# Altium PCB Receiver.PcbDoc (part 4 of 4)
Units mil, origin at the board's own origin, x right, y up, seen from the top; angles counter-clockwise.
Board outline 6370 x 5700 mil, 4 copper layers (Top Layer, GND, VCC, Bottom Layer), stack 23.756 mil thick; 303 components, 262 nets, 1184 pads, 312 vias.
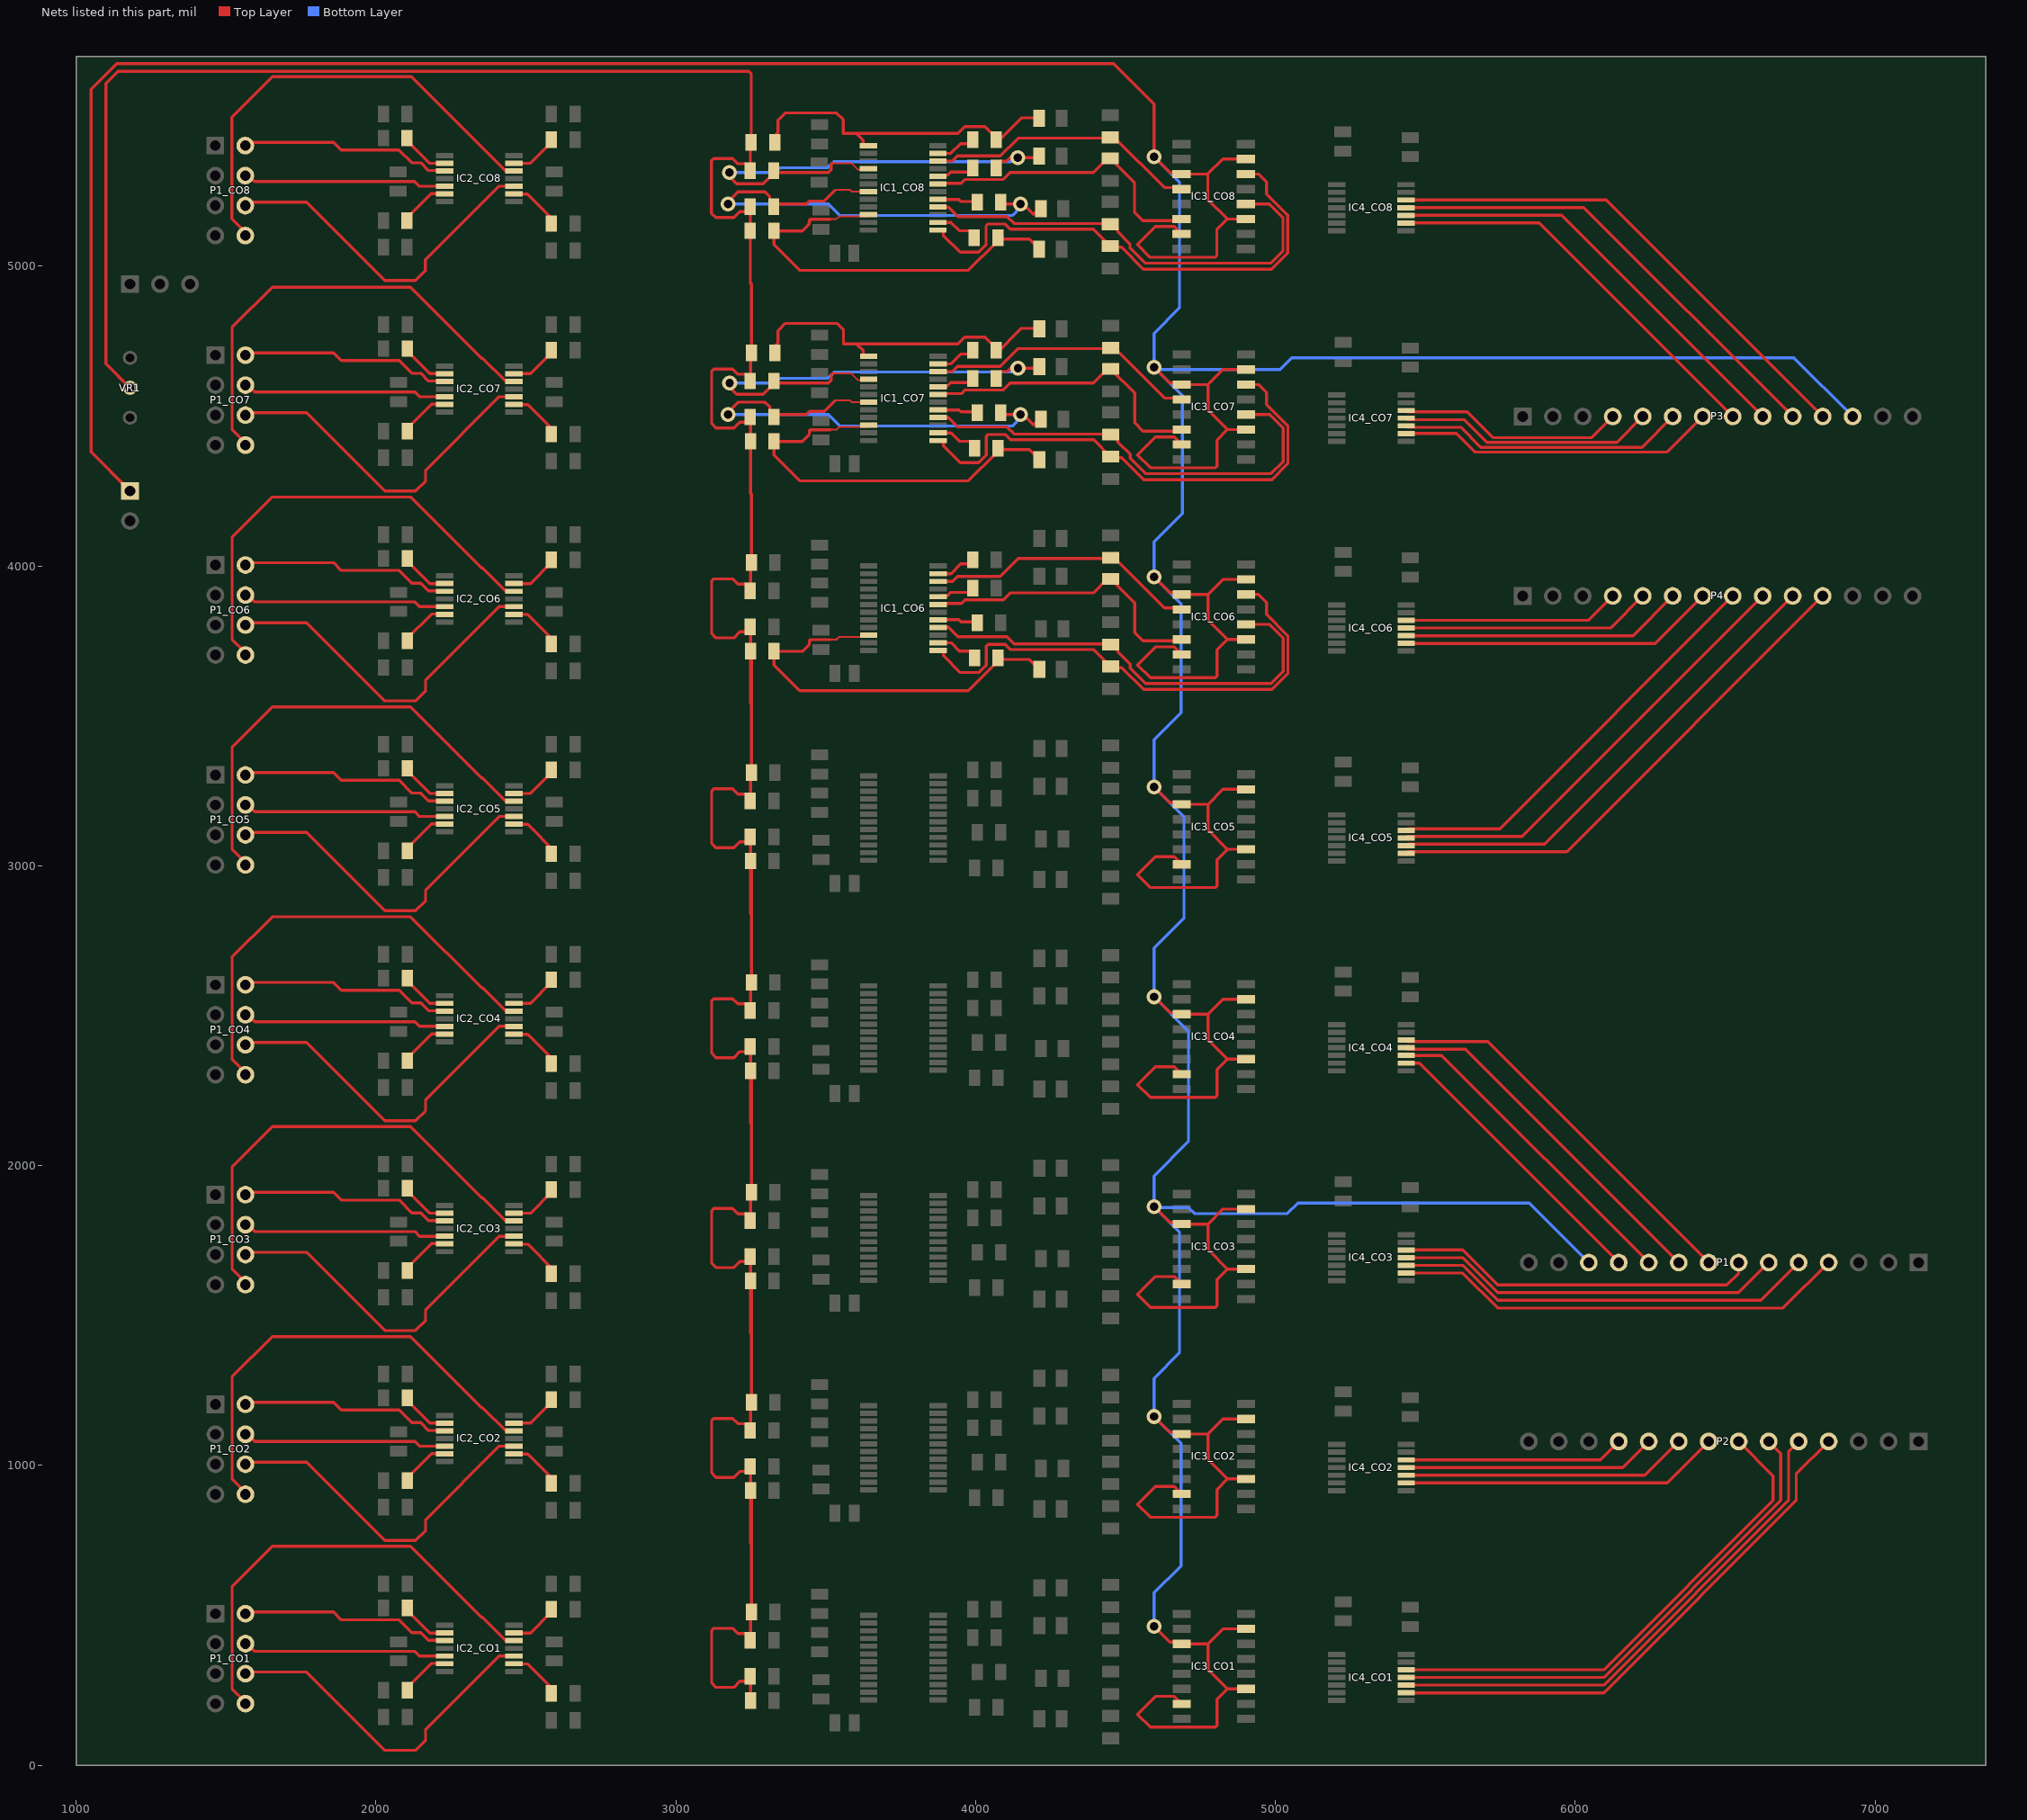
[diagram p6: the nets of this part, all layers, seen from the top]

## Via types
v1: diameter 50, hole 28, Top Layer to Bottom Layer, 312 vias

## Nets (pads, with @x,y where several pads share a name; then routed paths per layer and width w, separated by ;. In a path a pad name is that pad's centre, name@x,y a point inside that pad or via, vN(x,y) a via of type N, cw(c..) or ccw(c..) an arc to the next point about the centre after c; other vN are vias at no path point) (continued)
NetIC1_CO6_10: IC1_CO6.10 R7_CO6.2 R8_CO6.2 R11_CO6.2 | length 1397.6
  Top Layer w6: 3515.2,3754.23 3535.46,3754.23 3544.95,3763.71 3637.86,3763.71 IC1_CO6.10@3643.54,3769.39
  Top Layer w10: R7_CO6.2@3326.94,3715 R7_CO6.2@3327.94,3716 R7_CO6.2@3327.94,3715 ; 3515.2,3754.23 3449.15,3754.23 3446.81,3751.89 3446.81,3751.23 3446.15,3751.23 3446.15,3744.2 3445.5,3743.56 3445.5,3738.34 3422.16,3715 R7_CO6.2@3327.94,3715 ; R8_CO6.2@4067.34,3716 4095.31,3688.03 4179.57,3688.03 R11_CO6.2@4212.6,3655 ; R8_CO6.2@4074.8,3693.03 4068.73,3686.96 4068.73,3676.33 3976.4,3583.99 3413.83,3583.99 3327.94,3669.87 R7_CO6.2@3327.94,3715
NetIC1_CO6_13: IC1_CO6.13 IC3_CO6.14 R23_CO6.2 | length 1711.3
  Top Layer w10: IC1_CO6.13@3874.87,3718.2 3889.02,3718.2 3892.87,3714.35 3892.87,3700.2 3948.59,3644.49 4010.43,3644.49 4035.43,3669.49 4035.43,3732.49 4041.29,3738.34 4098.84,3738.34 4116.19,3721 4393.8,3721 R23_CO6.2@4450,3664.8 4454.03,3660.78 4487.69,3660.78 4560.43,3588.03 4988.06,3588.03 5041.43,3641.4 5041.43,3767.66 4970.43,3838.66 4970.43,3878.57 4944,3905 IC3_CO6.14@4902.16,3905
NetIC1_CO6_14: IC1_CO6.14 R8_CO6.1 | length 125.2
  Top Layer w10: IC1_CO6.14@3874.87,3743.8 3917.97,3743.8 3945.76,3716 R8_CO6.1@3988.6,3716
NetIC1_CO6_16: IC1_CO6.16 IC3_CO6.12 R24_CO6.2 | length 1511.5
  Top Layer w10: IC1_CO6.16@3874.87,3794.98 3910.36,3794.98 3941.63,3763.71 4104.8,3763.71 4128.51,3740 4447.84,3740 R24_CO6.2@4450,3737.84 4458.86,3737.84 4473.54,3723.16 4473.54,3714.3 4515.43,3672.41 4515.43,3658.99 4566.4,3608.03 4985.43,3608.03 5025.43,3648.03 5025.43,3760 4980.43,3805 IC3_CO6.12@4902.16,3805
NetIC1_CO6_17: IC1_CO6.17 R6_CO6.1 | length 116.6
  Top Layer w10: IC1_CO6.17@3874.87,3820.57 3944.28,3820.57 3951.13,3813.71 R6_CO6.1@3988.6,3813.71
NetIC1_CO6_19: IC1_CO6.19 IC3_CO6.6 R22_CO6.1 | length 983.6
  Top Layer w10: IC1_CO6.19@3874.87,3871.75 3877.84,3874.71 3952.6,3874.71 3964.93,3887.05 4092.63,3887.05 4115.58,3910 4393.22,3910 R22_CO6.1@4440,3956.78 ; R22_CO6.1@4450,3957.15 4530.43,3876.72 4530.43,3778.03 4558.46,3750 4682.59,3750 IC3_CO6.6@4687.59,3755
NetIC1_CO6_20: IC1_CO6.20 R4_CO6.1 | length 119.7
  Top Layer w10: IC1_CO6.20@3874.87,3897.34 3878.73,3901.2 3906.59,3901.2 3917.14,3911.75 R4_CO6.1@3988.6,3911.75
NetIC1_CO6_22: IC1_CO6.22 IC3_CO6.4 R21_CO6.1 | length 914.8
  Top Layer w10: IC1_CO6.22@3874.87,3948.52 3923.04,3948.52 3940,3965.48 4082.8,3965.48 4142.31,4025 4440,4025 4465.43,4025 4630.43,3860 4682.59,3860 IC3_CO6.4@4687.59,3855
NetIC1_CO6_23: IC1_CO6.23 R2_CO6.1 | length 127.2
  Top Layer w10: IC1_CO6.23@3874.87,3974.11 3917.97,3974.11 3950.61,4006.75 R2_CO6.1@3988.6,4006.75
NetIC1_CO7_1: IC1_CO7.1 R1_CO7.2 R2_CO7.2 R9_CO7.1 | length 1146.5
  Top Layer w10: R1_CO7.2@3327.94,4706.75 3331.13,4709.94 3331.13,4733.31 3341.07,4743.25 3341.07,4784.44 3365.62,4808.99 3537.19,4808.99 3559.43,4786.75 3559.43,4740.41 3602.83,4740.41 ; IC1_CO7.1@3643.54,4699.7 3629.39,4699.7 3625.53,4703.56 3625.53,4717.7 3602.83,4740.41 ; R2_CO7.2@4062.49,4732.22 4031.69,4763.03 3964.25,4763.03 3941.63,4740.41 3602.83,4740.41 ; R2_CO7.2@4067.34,4706.75 4153.11,4792.52 4209.37,4792.52 4210.63,4791.26 R9_CO7.1@4210.63,4782.4
NetIC1_CO7_4: IC1_CO7.4 R3_CO7.2 R4_CO7.2 R10_CO7.1 | length 1735.8
  Top Layer w6: 3522.97,4641.75 3585.97,4641.75 3607.97,4619.75 3640.35,4619.75 IC1_CO7.4@3643.54,4622.93
  Top Layer w10: v1(3180,4610) 3180,4600.6 3177.97,4598.57 3203.83,4572.71 3292.11,4572.71 3297.97,4578.57 ; 3298.04,4578.59 3327.34,4607.89 R3_CO7.2@3327.34,4616.75 ; R3_CO7.2@3327.94,4606.75 3331.13,4609.94 3509.26,4609.94 3518.7,4619.38 3518.7,4637.48 3522.97,4641.75 ; R4_CO7.2@4056.98,4625.61 R4_CO7.2@4069.37,4625.61 4069.37,4634.46 4083.07,4648.17 4104.16,4648.17 4133.63,4677.64 4141.27,4670 v1(4141.27,4660) 4207.12,4660 R10_CO7.1@4212.6,4665.48 ; R10_CO7.1@4207.34,4672.51 R10_CO7.1@4207.34,4681.37
  Bottom Layer w10: v1(3180,4610) 3331.22,4610 3347.22,4626 3507.22,4626 3527.97,4646.75 4117.97,4646.75 4135,4663.78 v1@4140,4663.78
NetIC1_CO7_7: IC1_CO7.7 R5_CO7.2 R6_CO7.2 R12_CO7.2 | length 1664
  Top Layer w6: 3530.76,4549.71 3533.76,4552.71 3540.56,4552.71 3540.6,4552.75 3580.76,4552.75 3587.35,4546.16 IC1_CO7.7@3643.54,4546.16
  Top Layer w10: 3187.97,4526.75 3207.38,4546.16 3297.97,4546.16 3313.64,4530.49 3313.64,4510.45 R5_CO7.2@3327.34,4496.75 ; R5_CO7.2@3333.73,4516.75 3333.73,4512.31 3341.04,4505 3435.92,4505 3446.15,4515.23 3496.28,4515.23 3530.76,4549.71 ; R6_CO7.2@4084.37,4510.96 4090.33,4505 v1@4128.51,4505 ; v1(4150,4505) 4158.5,4505 4193.05,4470.45 R12_CO7.2@4212.6,4490
  Bottom Layer w10: v1(3175,4505) 3509.72,4505 3547.97,4466.75 4122.57,4466.75 4150,4494.18 v1(4150,4505)
NetIC1_CO7_10: IC1_CO7.10 R7_CO7.2 R8_CO7.2 R11_CO7.2 | length 1397.6
  Top Layer w6: 3515.2,4454.23 3535.46,4454.23 3544.95,4463.71 3637.86,4463.71 IC1_CO7.10@3643.54,4469.39
  Top Layer w10: R7_CO7.2@3326.94,4415 R7_CO7.2@3327.94,4416 R7_CO7.2@3327.94,4415 ; 3515.2,4454.23 3449.15,4454.23 3446.81,4451.89 3446.81,4451.23 3446.15,4451.23 3446.15,4444.2 3445.5,4443.56 3445.5,4438.34 3422.16,4415 R7_CO7.2@3327.94,4415 ; R8_CO7.2@4067.34,4416 4095.31,4388.03 4179.57,4388.03 R11_CO7.2@4212.6,4355 ; R8_CO7.2@4074.8,4393.03 4068.73,4386.96 4068.73,4376.33 3976.4,4283.99 3413.83,4283.99 3327.94,4369.87 R7_CO7.2@3327.94,4415
NetIC1_CO7_13: IC1_CO7.13 IC3_CO7.14 R23_CO7.2 | length 1711.3
  Top Layer w10: IC1_CO7.13@3874.87,4418.2 3889.02,4418.2 3892.87,4414.35 3892.87,4400.2 3948.59,4344.49 4010.43,4344.49 4035.43,4369.49 4035.43,4432.49 4041.29,4438.34 4098.84,4438.34 4116.19,4421 4393.8,4421 R23_CO7.2@4450,4364.8 4454.03,4360.78 4487.69,4360.78 4560.43,4288.03 4988.06,4288.03 5041.43,4341.4 5041.43,4467.66 4970.43,4538.66 4970.43,4578.57 4944,4605 IC3_CO7.14@4902.16,4605
NetIC1_CO7_14: IC1_CO7.14 R8_CO7.1 | length 125.2
  Top Layer w10: IC1_CO7.14@3874.87,4443.8 3917.97,4443.8 3945.76,4416 R8_CO7.1@3988.6,4416
NetIC1_CO7_16: IC1_CO7.16 IC3_CO7.12 R24_CO7.2 | length 1511.5
  Top Layer w10: IC1_CO7.16@3874.87,4494.98 3910.36,4494.98 3941.63,4463.71 4104.8,4463.71 4128.51,4440 4447.84,4440 R24_CO7.2@4450,4437.84 4458.86,4437.84 4473.54,4423.16 4473.54,4414.3 4515.43,4372.41 4515.43,4358.99 4566.4,4308.03 4985.43,4308.03 5025.43,4348.03 5025.43,4460 4980.43,4505 IC3_CO7.12@4902.16,4505
NetIC1_CO7_17: IC1_CO7.17 R6_CO7.1 | length 116.6
  Top Layer w10: IC1_CO7.17@3874.87,4520.57 3944.28,4520.57 3951.13,4513.71 R6_CO7.1@3988.6,4513.71
NetIC1_CO7_19: IC1_CO7.19 IC3_CO7.6 R22_CO7.1 | length 983.6
  Top Layer w10: IC1_CO7.19@3874.87,4571.75 3877.84,4574.71 3952.6,4574.71 3964.93,4587.05 4092.63,4587.05 4115.58,4610 4393.22,4610 R22_CO7.1@4440,4656.78 ; R22_CO7.1@4450,4657.15 4530.43,4576.72 4530.43,4478.03 4558.46,4450 4682.59,4450 IC3_CO7.6@4687.59,4455
NetIC1_CO7_20: IC1_CO7.20 R4_CO7.1 | length 119.7
  Top Layer w10: IC1_CO7.20@3874.87,4597.34 3878.73,4601.2 3906.59,4601.2 3917.14,4611.75 R4_CO7.1@3988.6,4611.75
NetIC1_CO7_22: IC1_CO7.22 IC3_CO7.4 R21_CO7.1 | length 914.8
  Top Layer w10: IC1_CO7.22@3874.87,4648.52 3923.04,4648.52 3940,4665.48 4082.8,4665.48 4142.31,4725 4440,4725 4465.43,4725 4630.43,4560 4682.59,4560 IC3_CO7.4@4687.59,4555
NetIC1_CO7_23: IC1_CO7.23 R2_CO7.1 | length 127.2
  Top Layer w10: IC1_CO7.23@3874.87,4674.11 3917.97,4674.11 3950.61,4706.75 R2_CO7.1@3988.6,4706.75
NetIC1_CO8_1: IC1_CO8.1 R1_CO8.2 R2_CO8.2 R9_CO8.1 | length 1146.5
  Top Layer w10: R1_CO8.2@3327.51,5408.72 3330.7,5411.91 3330.7,5435.29 3340.64,5445.22 3340.64,5486.41 3365.19,5510.96 3536.76,5510.96 3559,5488.72 3559,5442.38 3602.39,5442.38 ; IC1_CO8.1@3643.1,5401.67 3628.96,5401.67 3625.1,5405.53 3625.1,5419.67 3602.39,5442.38 ; R2_CO8.2@4062.06,5434.2 4031.25,5465 3963.82,5465 3941.2,5442.38 3602.39,5442.38 ; R2_CO8.2@4066.91,5408.72 4152.68,5494.49 4208.94,5494.49 4210.2,5493.23 R9_CO8.1@4210.2,5484.37
NetIC1_CO8_4: IC1_CO8.4 R3_CO8.2 R4_CO8.2 R10_CO8.1 | length 1735.8
  Top Layer w6: 3522.54,5343.72 3585.54,5343.72 3607.54,5321.72 3639.92,5321.72 IC1_CO8.4@3643.1,5324.9
  Top Layer w10: v1(3179.57,5311.97) 3179.57,5302.57 3177.54,5300.54 3203.39,5274.68 3291.68,5274.68 3297.54,5280.54 ; 3297.61,5280.56 3326.91,5309.86 R3_CO8.2@3326.91,5318.72 ; R3_CO8.2@3327.51,5308.72 3330.7,5311.91 3508.83,5311.91 3518.27,5321.35 3518.27,5339.45 3522.54,5343.72 ; R4_CO8.2@4056.55,5327.58 R4_CO8.2@4068.94,5327.58 4068.94,5336.44 4082.64,5350.14 4103.72,5350.14 4133.2,5379.61 4140.83,5371.97 v1(4140.83,5361.97) 4206.68,5361.97 R10_CO8.1@4212.17,5367.45 ; R10_CO8.1@4206.91,5374.48 R10_CO8.1@4206.91,5383.34
  Bottom Layer w10: v1(3179.57,5311.97) 3330.79,5311.97 3346.79,5327.97 3506.79,5327.97 3527.54,5348.72 4117.54,5348.72 4134.57,5365.75 v1@4139.57,5365.75
NetIC1_CO8_7: IC1_CO8.7 R5_CO8.2 R6_CO8.2 R12_CO8.2 | length 1664
  Top Layer w6: 3530.33,5251.68 3533.33,5254.68 3540.13,5254.68 ; IC1_CO8.7@3643.1,5248.13 3586.92,5248.13 3580.33,5254.72 3540.17,5254.72 ; 3540.13,5254.68 3540.17,5254.72
  Top Layer w10: 3187.54,5228.72 3206.94,5248.13 3297.54,5248.13 3313.2,5232.46 3313.2,5212.42 R5_CO8.2@3326.91,5198.72 ; R5_CO8.2@3333.3,5218.72 3333.3,5214.28 3340.61,5206.97 3435.49,5206.97 3445.72,5217.2 3495.85,5217.2 3530.33,5251.68 ; R6_CO8.2@4083.94,5212.93 4089.9,5206.97 v1@4128.07,5206.97 ; v1(4149.57,5206.97) 4158.06,5206.97 4192.62,5172.42 R12_CO8.2@4212.17,5191.97
  Bottom Layer w10: v1(3174.57,5206.97) 3509.28,5206.97 3547.54,5168.72 4122.14,5168.72 4149.57,5196.15 v1(4149.57,5206.97)
NetIC1_CO8_10: IC1_CO8.10 R7_CO8.2 R8_CO8.2 R11_CO8.2 | length 1397.6
  Top Layer w6: 3514.77,5156.2 3535.03,5156.2 3544.51,5165.68 3637.43,5165.68 IC1_CO8.10@3643.1,5171.36
  Top Layer w10: R7_CO8.2@3326.51,5116.97 R7_CO8.2@3327.51,5117.97 R7_CO8.2@3327.51,5116.97 ; 3514.77,5156.2 3448.72,5156.2 3446.38,5153.86 3446.38,5153.2 3445.72,5153.2 3445.72,5146.18 3445.07,5145.53 3445.07,5140.31 3421.72,5116.97 R7_CO8.2@3327.51,5116.97 ; R8_CO8.2@4066.91,5117.97 4094.88,5090 4179.14,5090 R11_CO8.2@4212.17,5056.97 ; R8_CO8.2@4074.37,5095 4068.3,5088.93 4068.3,5078.3 3975.96,4985.96 3413.39,4985.96 3327.51,5071.84 R7_CO8.2@3327.51,5116.97
NetIC1_CO8_13: IC1_CO8.13 IC3_CO8.14 R23_CO8.2 | length 1711.3
  Top Layer w10: IC1_CO8.13@3874.44,5120.18 3888.58,5120.18 3892.44,5116.32 3892.44,5102.17 3948.15,5046.46 4010,5046.46 4035,5071.46 4035,5134.46 4040.86,5140.31 4098.41,5140.31 4115.75,5122.97 4393.37,5122.97 R23_CO8.2@4449.57,5066.77 4453.59,5062.75 4487.25,5062.75 4560,4990 4987.63,4990 5041,5043.37 5041,5169.63 4970,5240.63 4970,5280.54 4943.57,5306.97 IC3_CO8.14@4901.72,5306.97
NetIC1_CO8_14: IC1_CO8.14 R8_CO8.1 | length 125.2
  Top Layer w10: IC1_CO8.14@3874.44,5145.77 3917.54,5145.77 3945.33,5117.97 R8_CO8.1@3988.17,5117.97
NetIC1_CO8_16: IC1_CO8.16 IC3_CO8.12 R24_CO8.2 | length 1511.5
  Top Layer w10: IC1_CO8.16@3874.44,5196.95 3909.93,5196.95 3941.2,5165.68 4104.36,5165.68 4128.07,5141.97 4447.41,5141.97 R24_CO8.2@4449.57,5139.81 4458.43,5139.81 4473.11,5125.13 4473.11,5116.27 4515,5074.38 4515,5060.96 4565.96,5010 4985,5010 5025,5050 5025,5161.97 4980,5206.97 IC3_CO8.12@4901.72,5206.97
NetIC1_CO8_17: IC1_CO8.17 R6_CO8.1 | length 116.6
  Top Layer w10: IC1_CO8.17@3874.44,5222.54 3943.84,5222.54 3950.7,5215.68 R6_CO8.1@3988.17,5215.68
NetIC1_CO8_19: IC1_CO8.19 IC3_CO8.6 R22_CO8.1 | length 983.6
  Top Layer w10: IC1_CO8.19@3874.44,5273.72 3877.4,5276.68 3952.16,5276.68 3964.5,5289.02 4092.19,5289.02 4115.15,5311.97 4392.78,5311.97 R22_CO8.1@4439.57,5358.75 ; R22_CO8.1@4449.57,5359.12 4530,5278.69 4530,5180 4558.03,5151.97 4682.16,5151.97 IC3_CO8.6@4687.16,5156.97
NetIC1_CO8_20: IC1_CO8.20 R4_CO8.1 | length 119.7
  Top Layer w10: IC1_CO8.20@3874.44,5299.31 3878.3,5303.17 3906.16,5303.17 3916.71,5313.72 R4_CO8.1@3988.17,5313.72
NetIC1_CO8_22: IC1_CO8.22 IC3_CO8.4 R21_CO8.1 | length 914.8
  Top Layer w10: IC1_CO8.22@3874.44,5350.49 3922.61,5350.49 3939.57,5367.45 4082.36,5367.45 4141.88,5426.97 4439.57,5426.97 4465,5426.97 4630,5261.97 4682.16,5261.97 IC3_CO8.4@4687.16,5256.97
NetIC1_CO8_23: IC1_CO8.23 R2_CO8.1 | length 127.2
  Top Layer w10: IC1_CO8.23@3874.44,5376.08 3917.54,5376.08 3950.17,5408.72 R2_CO8.1@3988.17,5408.72
NetIC2_CO1_2: IC2_CO1.2 R13_CO1.2 | length 165.5
  Top Layer w10: R13_CO1.2@2104.37,525 2104.37,516.14 2179.33,441.18 IC2_CO1.2@2229.57,441.18 ; R13_CO1.2@2105,503.7 R13_CO1.2@2105,504.11
NetIC2_CO1_6: IC2_CO1.6 R14_CO1.1 | length 167.9
  Top Layer w10: R14_CO1.1@2104.37,250 2104.37,258.86 2185.18,339.67 2228.72,339.67 IC2_CO1.6@2229.57,338.82
NetIC2_CO1_9: IC2_CO1.9 R15_CO1.1 | length 180.8
  Top Layer w10: IC2_CO1.9@2460.91,338.82 2461.69,338.03 2506.46,338.03 2595.63,248.86 R15_CO1.1@2595.63,240
NetIC2_CO1_13: IC2_CO1.13 R16_CO1.2 | length 162.6
  Top Layer w10: IC2_CO1.13@2460.91,441.18 2515.67,441.18 2585.63,511.14 R16_CO1.2@2585.63,520
NetIC2_CO2_2: IC2_CO2.2 R13_CO2.2 | length 165.5
  Top Layer w10: R13_CO2.2@2104.37,1225 2104.37,1216.14 2179.33,1141.18 IC2_CO2.2@2229.57,1141.18 ; R13_CO2.2@2105,1203.7 R13_CO2.2@2105,1204.11
NetIC2_CO2_6: IC2_CO2.6 R14_CO2.1 | length 167.9
  Top Layer w10: R14_CO2.1@2104.37,950 2104.37,958.86 2185.18,1039.67 2228.72,1039.67 IC2_CO2.6@2229.57,1038.82
NetIC2_CO2_9: IC2_CO2.9 R15_CO2.1 | length 180.8
  Top Layer w10: IC2_CO2.9@2460.91,1038.82 2461.69,1038.03 2506.46,1038.03 2595.63,948.86 R15_CO2.1@2595.63,940
NetIC2_CO2_13: IC2_CO2.13 R16_CO2.2 | length 162.6
  Top Layer w10: IC2_CO2.13@2460.91,1141.18 2515.67,1141.18 2585.63,1211.14 R16_CO2.2@2585.63,1220
NetIC2_CO3_2: IC2_CO3.2 R13_CO3.2 | length 165.5
  Top Layer w10: R13_CO3.2@2104.37,1925 2104.37,1916.14 2179.33,1841.18 IC2_CO3.2@2229.57,1841.18 ; R13_CO3.2@2105,1903.7 R13_CO3.2@2105,1904.11
NetIC2_CO3_6: IC2_CO3.6 R14_CO3.1 | length 167.9
  Top Layer w10: R14_CO3.1@2104.37,1650 2104.37,1658.86 2185.18,1739.67 2228.72,1739.67 IC2_CO3.6@2229.57,1738.82
NetIC2_CO3_9: IC2_CO3.9 R15_CO3.1 | length 180.8
  Top Layer w10: IC2_CO3.9@2460.91,1738.82 2461.69,1738.03 2506.46,1738.03 2595.63,1648.86 R15_CO3.1@2595.63,1640
NetIC2_CO3_13: IC2_CO3.13 R16_CO3.2 | length 162.6
  Top Layer w10: IC2_CO3.13@2460.91,1841.18 2515.67,1841.18 2585.63,1911.14 R16_CO3.2@2585.63,1920
NetIC2_CO4_2: IC2_CO4.2 R13_CO4.2 | length 165.5
  Top Layer w10: R13_CO4.2@2104.37,2625 2104.37,2616.14 2179.33,2541.18 IC2_CO4.2@2229.57,2541.18 ; R13_CO4.2@2105,2603.7 R13_CO4.2@2105,2604.11
NetIC2_CO4_6: IC2_CO4.6 R14_CO4.1 | length 167.9
  Top Layer w10: R14_CO4.1@2104.37,2350 2104.37,2358.86 2185.18,2439.67 2228.72,2439.67 IC2_CO4.6@2229.57,2438.82
NetIC2_CO4_9: IC2_CO4.9 R15_CO4.1 | length 180.8
  Top Layer w10: IC2_CO4.9@2460.91,2438.82 2461.69,2438.03 2506.46,2438.03 2595.63,2348.86 R15_CO4.1@2595.63,2340
NetIC2_CO4_13: IC2_CO4.13 R16_CO4.2 | length 162.6
  Top Layer w10: IC2_CO4.13@2460.91,2541.18 2515.67,2541.18 2585.63,2611.14 R16_CO4.2@2585.63,2620
NetIC2_CO5_2: IC2_CO5.2 R13_CO5.2 | length 165.5
  Top Layer w10: R13_CO5.2@2104.37,3325 2104.37,3316.14 2179.33,3241.18 IC2_CO5.2@2229.57,3241.18 ; R13_CO5.2@2105,3303.7 R13_CO5.2@2105,3304.11
NetIC2_CO5_6: IC2_CO5.6 R14_CO5.1 | length 167.9
  Top Layer w10: R14_CO5.1@2104.37,3050 2104.37,3058.86 2185.18,3139.67 2228.72,3139.67 IC2_CO5.6@2229.57,3138.82
NetIC2_CO5_9: IC2_CO5.9 R15_CO5.1 | length 180.8
  Top Layer w10: IC2_CO5.9@2460.91,3138.82 2461.69,3138.03 2506.46,3138.03 2595.63,3048.86 R15_CO5.1@2595.63,3040
NetIC2_CO5_13: IC2_CO5.13 R16_CO5.2 | length 162.6
  Top Layer w10: IC2_CO5.13@2460.91,3241.18 2515.67,3241.18 2585.63,3311.14 R16_CO5.2@2585.63,3320
NetIC2_CO6_2: IC2_CO6.2 R13_CO6.2 | length 165.5
  Top Layer w10: R13_CO6.2@2104.37,4025 2104.37,4016.14 2179.33,3941.18 IC2_CO6.2@2229.57,3941.18 ; R13_CO6.2@2105,4003.7 R13_CO6.2@2105,4004.11
NetIC2_CO6_6: IC2_CO6.6 R14_CO6.1 | length 167.9
  Top Layer w10: R14_CO6.1@2104.37,3750 2104.37,3758.86 2185.18,3839.67 2228.72,3839.67 IC2_CO6.6@2229.57,3838.82
NetIC2_CO6_9: IC2_CO6.9 R15_CO6.1 | length 180.8
  Top Layer w10: IC2_CO6.9@2460.91,3838.82 2461.69,3838.03 2506.46,3838.03 2595.63,3748.86 R15_CO6.1@2595.63,3740
NetIC2_CO6_13: IC2_CO6.13 R16_CO6.2 | length 162.6
  Top Layer w10: IC2_CO6.13@2460.91,3941.18 2515.67,3941.18 2585.63,4011.14 R16_CO6.2@2585.63,4020
NetIC2_CO7_2: IC2_CO7.2 R13_CO7.2 | length 165.5
  Top Layer w10: R13_CO7.2@2104.37,4725 2104.37,4716.14 2179.33,4641.18 IC2_CO7.2@2229.57,4641.18 ; R13_CO7.2@2105,4703.7 R13_CO7.2@2105,4704.11
NetIC2_CO7_6: IC2_CO7.6 R14_CO7.1 | length 167.9
  Top Layer w10: R14_CO7.1@2104.37,4450 2104.37,4458.86 2185.18,4539.67 2228.72,4539.67 IC2_CO7.6@2229.57,4538.82
NetIC2_CO7_9: IC2_CO7.9 R15_CO7.1 | length 180.8
  Top Layer w10: IC2_CO7.9@2460.91,4538.82 2461.69,4538.03 2506.46,4538.03 2595.63,4448.86 R15_CO7.1@2595.63,4440
NetIC2_CO7_13: IC2_CO7.13 R16_CO7.2 | length 162.6
  Top Layer w10: IC2_CO7.13@2460.91,4641.18 2515.67,4641.18 2585.63,4711.14 R16_CO7.2@2585.63,4720
NetIC2_CO8_2: IC2_CO8.2 R13_CO8.2 | length 165.5
  Top Layer w10: R13_CO8.2@2103.94,5426.97 2103.94,5418.11 2178.9,5343.15 IC2_CO8.2@2229.13,5343.15 ; R13_CO8.2@2104.57,5405.67 R13_CO8.2@2104.57,5406.08
NetIC2_CO8_6: IC2_CO8.6 R14_CO8.1 | length 167.9
  Top Layer w10: R14_CO8.1@2103.94,5151.97 2103.94,5160.83 2184.75,5241.64 2228.29,5241.64 IC2_CO8.6@2229.13,5240.79
NetIC2_CO8_9: IC2_CO8.9 R15_CO8.1 | length 180.8
  Top Layer w10: IC2_CO8.9@2460.47,5240.79 2461.26,5240 2506.03,5240 2595.2,5150.83 R15_CO8.1@2595.2,5141.97
NetIC2_CO8_13: IC2_CO8.13 R16_CO8.2 | length 162.6
  Top Layer w10: IC2_CO8.13@2460.47,5343.15 2515.24,5343.15 2585.2,5413.11 R16_CO8.2@2585.2,5421.97
NetIC4_CO1_2: IC4_CO1.2 P2.4 | length 1807.7
  Top Layer w10: IC4_CO1.2@5436.1,241.85 6095,241.85 6736.77,883.62 6736.77,971.77 P2.4@6845,1080
NetIC4_CO1_3: IC4_CO1.3 P2.5 | length 1740.7
  Top Layer w10: IC4_CO1.3@5436.1,267.44 6095,267.44 6711.18,883.62 6711.18,1046.18 P2.5@6745,1080
NetIC4_CO1_4: IC4_CO1.4 P2.6 | length 1707.3
  Top Layer w10: IC4_CO1.4@5436.1,293.03 6095,293.03 6685.59,883.62 6685.59,1039.41 P2.6@6645,1080
NetIC4_CO1_5: IC4_CO1.5 P2.7 | length 1701.9
  Top Layer w10: IC4_CO1.5@5436.1,318.62 6095,318.62 6660,883.62 6660,965 P2.7@6545,1080
NetIC4_CO2_2: IC4_CO2.2 P2.8 | length 1066.1
  Top Layer w10: IC4_CO2.2@5436.1,941.85 6306.85,941.85 P2.8@6445,1080
NetIC4_CO2_3: IC4_CO2.3 P2.9 | length 955.5
  Top Layer w10: IC4_CO2.3@5436.1,967.44 6232.44,967.44 P2.9@6345,1080
NetIC4_CO2_4: IC4_CO2.4 P2.10 | length 844.9
  Top Layer w10: IC4_CO2.4@5436.1,993.03 6158.03,993.03 P2.10@6245,1080
NetIC4_CO2_5: IC4_CO2.5 P2.11 | length 734.3
  Top Layer w10: IC4_CO2.5@5436.1,1018.62 6083.62,1018.62 P2.11@6145,1080
NetIC4_CO3_2: IC4_CO3.2 P1.4 | length 1520.2
  Top Layer w10: IC4_CO3.2@5436.1,1641.85 5625,1641.85 5741.85,1525 6693.25,1525 P1.4@6845,1676.75
NetIC4_CO3_3: IC4_CO3.3 P1.5 | length 1409.6
  Top Layer w10: IC4_CO3.3@5436.1,1667.44 5625,1667.44 5741.85,1550.59 6618.84,1550.59 P1.5@6745,1676.75
NetIC4_CO3_4: IC4_CO3.4 P1.6 | length 1299
  Top Layer w10: IC4_CO3.4@5436.1,1693.03 5625,1693.03 5741.85,1576.18 6544.43,1576.18 P1.6@6645,1676.75
NetIC4_CO3_5: IC4_CO3.5 P1.7 | length 1208.8
  Top Layer w10: IC4_CO3.5@5436.1,1718.62 5625,1718.62 5741.85,1601.77 6505,1601.77 6545,1641.77 P1.7@6545,1676.75
NetIC4_CO4_2: IC4_CO4.2 P1.11 | length 984.4
  Top Layer w10: IC4_CO4.2@5436.1,2341.85 5479.9,2341.85 P1.11@6145,1676.75
NetIC4_CO4_3: IC4_CO4.3 P1.10 | length 1095
  Top Layer w10: IC4_CO4.3@5436.1,2367.44 5554.31,2367.44 P1.10@6245,1676.75
NetIC4_CO4_4: IC4_CO4.4 P1.9 | length 1198.5
  Top Layer w10: IC4_CO4.4@5441.1,2388.03 5633.72,2388.03 P1.9@6345,1676.75
NetIC4_CO4_5: IC4_CO4.5 P1.8 | length 1309.1
  Top Layer w10: IC4_CO4.5@5441.1,2413.62 5708.13,2413.62 P1.8@6445,1676.75
NetIC4_CO5_2: IC4_CO5.2 P4.11 | length 1737.3
  Top Layer w10: IC4_CO5.2@5441.1,3046.85 5971.85,3046.85 P4.11@6825,3900
NetIC4_CO5_3: IC4_CO5.3 P4.10 | length 1626.7
  Top Layer w10: IC4_CO5.3@5441.1,3072.44 5897.44,3072.44 P4.10@6725,3900
NetIC4_CO5_4: IC4_CO5.4 P4.9 | length 1516.1
  Top Layer w10: IC4_CO5.4@5441.1,3098.03 5823.03,3098.03 P4.9@6625,3900
NetIC4_CO5_5: IC4_CO5.5 P4.8 | length 1405.5
  Top Layer w10: IC4_CO5.5@5441.1,3123.62 5748.62,3123.62 P4.8@6525,3900
NetIC4_CO6_2: IC4_CO6.2 P4.7 | length 1054.4
  Top Layer w10: IC4_CO6.2@5436.1,3741.85 6266.85,3741.85 P4.7@6425,3900
NetIC4_CO6_3: IC4_CO6.3 P4.6 | length 943.8
  Top Layer w10: IC4_CO6.3@5436.1,3767.44 6192.44,3767.44 P4.6@6325,3900
NetIC4_CO6_4: IC4_CO6.4 P4.5 | length 833.2
  Top Layer w10: IC4_CO6.4@5436.1,3793.03 6118.03,3793.03 P4.5@6225,3900
NetIC4_CO6_5: IC4_CO6.5 P4.4 | length 722.6
  Top Layer w10: IC4_CO6.5@5436.1,3818.62 6043.62,3818.62 P4.4@6125,3900
NetIC4_CO7_2: IC4_CO7.2 P3.7 | length 1063.6
  Top Layer w10: IC4_CO7.2@5436.1,4441.85 5603.15,4441.85 5665,4380 6306.43,4380 P3.7@6425,4498.57
NetIC4_CO7_3: IC4_CO7.3 P3.6 | length 953.9
  Top Layer w10: IC4_CO7.3@5441.1,4462.44 5618.75,4462.44 5685.19,4396 6222.43,4396 P3.6@6325,4498.57
NetIC4_CO7_4: IC4_CO7.4 P3.5 | length 851.2
  Top Layer w10: IC4_CO7.4@5441.1,4488.03 5629.35,4488.03 5705.38,4412 6138.43,4412 P3.5@6225,4498.57
NetIC4_CO7_5: IC4_CO7.5 P3.4 | length 748.6
  Top Layer w10: IC4_CO7.5@5441.1,4513.62 5639.95,4513.62 5725.57,4428 6054.43,4428 P3.4@6125,4498.57
NetIC4_CO8_2: IC4_CO8.2 P3.8 | length 1356.6
  Top Layer w10: IC4_CO8.2@5435.67,5143.82 5879.75,5143.82 P3.8@6525,4498.57
NetIC4_CO8_3: IC4_CO8.3 P3.9 | length 1467.2
  Top Layer w10: IC4_CO8.3@5435.67,5169.41 5954.16,5169.41 P3.9@6625,4498.57
NetIC4_CO8_4: IC4_CO8.4 P3.10 | length 1577.8
  Top Layer w10: IC4_CO8.4@5435.67,5195 6028.57,5195 P3.10@6725,4498.57
NetIC4_CO8_5: IC4_CO8.5 P3.11 | length 1688.4
  Top Layer w10: IC4_CO8.5@5435.67,5220.59 6102.98,5220.59 P3.11@6825,4498.57
RecA_CO1: IC2_CO1.3 P1_CO1.2 | length 704.1
  Top Layer w10: P1_CO1.2@1565,510.96 1859.04,510.96 1885,485 2077.57,485 2120,442.57 2149.61,442.57 2175.43,416.75 2228.41,416.75 IC2_CO1.3@2229.57,415.59
RecA_CO2: IC2_CO2.3 P1_CO2.2 | length 704.1
  Top Layer w10: P1_CO2.2@1565,1210.96 1859.04,1210.96 1885,1185 2077.57,1185 2120,1142.57 2149.61,1142.57 2175.43,1116.75 2228.41,1116.75 IC2_CO2.3@2229.57,1115.59
RecA_CO3: IC2_CO3.3 P1_CO3.2 | length 704.1
  Top Layer w10: P1_CO3.2@1565,1910.96 1859.04,1910.96 1885,1885 2077.57,1885 2120,1842.57 2149.61,1842.57 2175.43,1816.75 2228.41,1816.75 IC2_CO3.3@2229.57,1815.59
RecA_CO4: IC2_CO4.3 P1_CO4.2 | length 704.1
  Top Layer w10: P1_CO4.2@1565,2610.96 1859.04,2610.96 1885,2585 2077.57,2585 2120,2542.57 2149.61,2542.57 2175.43,2516.75 2228.41,2516.75 IC2_CO4.3@2229.57,2515.59
RecA_CO5: IC2_CO5.3 P1_CO5.2 | length 704.1
  Top Layer w10: P1_CO5.2@1565,3310.96 1859.04,3310.96 1885,3285 2077.57,3285 2120,3242.57 2149.61,3242.57 2175.43,3216.75 2228.41,3216.75 IC2_CO5.3@2229.57,3215.59
RecA_CO6: IC2_CO6.3 P1_CO6.2 | length 704.1
  Top Layer w10: P1_CO6.2@1565,4010.96 1859.04,4010.96 1885,3985 2077.57,3985 2120,3942.57 2149.61,3942.57 2175.43,3916.75 2228.41,3916.75 IC2_CO6.3@2229.57,3915.59
RecA_CO7: IC2_CO7.3 P1_CO7.2 | length 704.1
  Top Layer w10: P1_CO7.2@1565,4710.96 1859.04,4710.96 1885,4685 2077.57,4685 2120,4642.57 2149.61,4642.57 2175.43,4616.75 2228.41,4616.75 IC2_CO7.3@2229.57,4615.59
RecA_CO8: IC2_CO8.3 P1_CO8.2 | length 704.1
  Top Layer w10: P1_CO8.2@1564.57,5412.93 1858.61,5412.93 1884.57,5386.97 2077.13,5386.97 2119.57,5344.54 2149.18,5344.54 2175,5318.72 2227.98,5318.72 IC2_CO8.3@2229.13,5317.56
RecB_CO1: IC2_CO1.5 P1_CO1.4 | length 683.8
  Top Layer w10: P1_CO1.4@1565,410.96 1595.96,380 2130,380 2145.59,364.41 IC2_CO1.5@2229.57,364.41
RecB_CO2: IC2_CO2.5 P1_CO2.4 | length 683.8
  Top Layer w10: P1_CO2.4@1565,1110.96 1595.96,1080 2130,1080 2145.59,1064.41 IC2_CO2.5@2229.57,1064.41
RecB_CO3: IC2_CO3.5 P1_CO3.4 | length 683.8
  Top Layer w10: P1_CO3.4@1565,1810.96 1595.96,1780 2130,1780 2145.59,1764.41 IC2_CO3.5@2229.57,1764.41
RecB_CO4: IC2_CO4.5 P1_CO4.4 | length 683.8
  Top Layer w10: P1_CO4.4@1565,2510.96 1595.96,2480 2130,2480 2145.59,2464.41 IC2_CO4.5@2229.57,2464.41
RecB_CO5: IC2_CO5.5 P1_CO5.4 | length 683.8
  Top Layer w10: P1_CO5.4@1565,3210.96 1595.96,3180 2130,3180 2145.59,3164.41 IC2_CO5.5@2229.57,3164.41
RecB_CO6: IC2_CO6.5 P1_CO6.4 | length 683.8
  Top Layer w10: P1_CO6.4@1565,3910.96 1595.96,3880 2130,3880 2145.59,3864.41 IC2_CO6.5@2229.57,3864.41
RecB_CO7: IC2_CO7.5 P1_CO7.4 | length 683.8
  Top Layer w10: P1_CO7.4@1565,4610.96 1595.96,4580 2130,4580 2145.59,4564.41 IC2_CO7.5@2229.57,4564.41
RecB_CO8: IC2_CO8.5 P1_CO8.4 | length 683.8
  Top Layer w10: P1_CO8.4@1564.57,5312.93 1595.53,5281.97 2129.57,5281.97 2145.16,5266.38 IC2_CO8.5@2229.13,5266.38
RecC_CO1: IC2_CO1.10 P1_CO1.6 | length 1155.5
  Top Layer w10: P1_CO1.6@1565,310.96 1769.04,310.96 2030,50 2132.4,50 2165.73,83.33 2165.73,119.71 2410.43,364.41 IC2_CO1.10@2460.91,364.41
RecC_CO2: IC2_CO2.10 P1_CO2.6 | length 1155.5
  Top Layer w10: P1_CO2.6@1565,1010.96 1769.04,1010.96 2030,750 2132.4,750 2165.73,783.33 2165.73,819.71 2410.43,1064.41 IC2_CO2.10@2460.91,1064.41
RecC_CO3: IC2_CO3.10 P1_CO3.6 | length 1155.5
  Top Layer w10: P1_CO3.6@1565,1710.96 1769.04,1710.96 2030,1450 2132.4,1450 2165.73,1483.33 2165.73,1519.71 2410.43,1764.41 IC2_CO3.10@2460.91,1764.41
RecC_CO4: IC2_CO4.10 P1_CO4.6 | length 1155.5
  Top Layer w10: P1_CO4.6@1565,2410.96 1769.04,2410.96 2030,2150 2132.4,2150 2165.73,2183.33 2165.73,2219.71 2410.43,2464.41 IC2_CO4.10@2460.91,2464.41
RecC_CO5: IC2_CO5.10 P1_CO5.6 | length 1155.5
  Top Layer w10: P1_CO5.6@1565,3110.96 1769.04,3110.96 2030,2850 2132.4,2850 2165.73,2883.33 2165.73,2919.71 2410.43,3164.41 IC2_CO5.10@2460.91,3164.41
RecC_CO6: IC2_CO6.10 P1_CO6.6 | length 1155.5
  Top Layer w10: P1_CO6.6@1565,3810.96 1769.04,3810.96 2030,3550 2132.4,3550 2165.73,3583.33 2165.73,3619.71 2410.43,3864.41 IC2_CO6.10@2460.91,3864.41
RecC_CO7: IC2_CO7.10 P1_CO7.6 | length 1155.5
  Top Layer w10: P1_CO7.6@1565,4510.96 1769.04,4510.96 2030,4250 2132.4,4250 2165.73,4283.33 2165.73,4319.71 2410.43,4564.41 IC2_CO7.10@2460.91,4564.41
RecC_CO8: IC2_CO8.10 P1_CO8.6 | length 1155.5
  Top Layer w10: P1_CO8.6@1564.57,5212.93 1768.61,5212.93 2029.57,4951.97 2131.97,4951.97 2165.3,4985.3 2165.3,5021.68 2410,5266.38 IC2_CO8.10@2460.47,5266.38
RecD_CO1: IC2_CO1.12 P1_CO1.8 | length 1529.3
  Top Layer w10: P1_CO1.8@1565,210.96 1520.47,255.49 1520.47,595.47 1655,730 2115.15,730 2352.12,493.03 2355.43,493.03 2432.87,415.59 IC2_CO1.12@2460.91,415.59
RecD_CO2: IC2_CO2.12 P1_CO2.8 | length 1529.3
  Top Layer w10: P1_CO2.8@1565,910.96 1520.47,955.49 1520.47,1295.47 1655,1430 2115.15,1430 2352.12,1193.03 2355.43,1193.03 2432.87,1115.59 IC2_CO2.12@2460.91,1115.59
RecD_CO3: IC2_CO3.12 P1_CO3.8 | length 1529.3
  Top Layer w10: P1_CO3.8@1565,1610.96 1520.47,1655.49 1520.47,1995.47 1655,2130 2115.15,2130 2352.12,1893.03 2355.43,1893.03 2432.87,1815.59 IC2_CO3.12@2460.91,1815.59
RecD_CO4: IC2_CO4.12 P1_CO4.8 | length 1529.3
  Top Layer w10: P1_CO4.8@1565,2310.96 1520.47,2355.49 1520.47,2695.47 1655,2830 2115.15,2830 2352.12,2593.03 2355.43,2593.03 2432.87,2515.59 IC2_CO4.12@2460.91,2515.59
RecD_CO5: IC2_CO5.12 P1_CO5.8 | length 1529.3
  Top Layer w10: P1_CO5.8@1565,3010.96 1520.47,3055.49 1520.47,3395.47 1655,3530 2115.15,3530 2352.12,3293.03 2355.43,3293.03 2432.87,3215.59 IC2_CO5.12@2460.91,3215.59
RecD_CO6: IC2_CO6.12 P1_CO6.8 | length 1529.3
  Top Layer w10: P1_CO6.8@1565,3710.96 1520.47,3755.49 1520.47,4095.47 1655,4230 2115.15,4230 2352.12,3993.03 2355.43,3993.03 2432.87,3915.59 IC2_CO6.12@2460.91,3915.59
RecD_CO7: IC2_CO7.12 P1_CO7.8 | length 1529.3
  Top Layer w10: P1_CO7.8@1565,4410.96 1520.47,4455.49 1520.47,4795.47 1655,4930 2115.15,4930 2352.12,4693.03 2355.43,4693.03 2432.87,4615.59 IC2_CO7.12@2460.91,4615.59
RecD_CO8: IC2_CO8.12 P1_CO8.8 | length 1529.3
  Top Layer w10: P1_CO8.8@1564.57,5112.93 1520.04,5157.46 1520.04,5497.44 1654.57,5631.97 2118.03,5631.97 2432.44,5317.56 IC2_CO8.12@2460.47,5317.56
THRESH: R1_CO1.1 R1_CO2.1 R1_CO3.1 R1_CO4.1 R1_CO5.1 R1_CO6.1 R1_CO7.1 R1_CO8.1 R3_CO1.1 R3_CO2.1 R3_CO3.1 R3_CO4.1 R3_CO5.1 R3_CO6.1 R3_CO7.1 R3_CO8.1 R5_CO1.1 R5_CO2.1 R5_CO3.1 R5_CO4.1 R5_CO5.1 R5_CO6.1 R5_CO7.1 R5_CO8.1 R7_CO1.1 R7_CO2.1 R7_CO3.1 R7_CO4.1 R7_CO5.1 R7_CO6.1 R7_CO7.1 R7_CO8.1 VR1.2 | length 13383.9
  Top Layer w10: VR1.2@1180,4594.23 1100,4674.23 1100,5610 1140,5650 3243.5,5650 3251.72,5641.77 R1_CO8.1@3251.72,5412.93 ; R3_CO8.1@3248.17,5318.72 3248.17,5327.58 3234.46,5341.28 3207.01,5341.28 3189.57,5358.72 3126.32,5358.72 3119.57,5351.97 3119.57,5176.36 3133.95,5161.97 3193.86,5161.97 3213.86,5181.97 3248.77,5181.97 R7_CO8.1@3248.77,5117.97 3248.77,4943.19 3252.16,4939.8 R1_CO7.1@3252.16,4710.96 ; R3_CO1.1@3248.6,416.75 3248.6,425.61 3234.9,439.31 3207.44,439.31 3190,456.75 3126.75,456.75 3120,450 3120,274.39 3134.39,260 3194.29,260 3214.29,280 3249.2,280 R7_CO1.1@3249.2,216 ; R3_CO2.1@3248.6,1116.75 3248.6,1125.61 3234.9,1139.31 3207.44,1139.31 3190,1156.75 3126.75,1156.75 3120,1150 3120,974.39 3134.39,960 3194.29,960 3214.29,980 3249.2,980 R7_CO2.1@3249.2,916 3249.2,741.22 ; R3_CO3.1@3248.6,1816.75 3248.6,1825.61 3234.9,1839.31 3207.44,1839.31 3190,1856.75 3126.75,1856.75 3120,1850 3120,1674.39 3134.39,1660 3194.29,1660 3214.29,1680 3249.2,1680 R7_CO3.1@3249.2,1616 3249.2,1441.22 ; R3_CO4.1@3248.6,2516.75 3248.6,2525.61 3234.9,2539.31 3207.44,2539.31 3190,2556.75 3126.75,2556.75 3120,2550 3120,2374.39 3134.39,2360 3194.29,2360 3214.29,2380 3249.2,2380 R7_CO4.1@3249.2,2316 3249.2,2141.22 ; R3_CO5.1@3248.6,3216.75 3248.6,3225.61 3234.9,3239.31 3207.44,3239.31 3190,3256.75 3126.75,3256.75 3120,3250 3120,3074.39 3134.39,3060 3194.29,3060 3214.29,3080 3249.2,3080 R7_CO5.1@3249.2,3016 3249.2,2841.22 ; R3_CO6.1@3248.6,3916.75 3248.6,3925.61 3234.9,3939.31 3207.44,3939.31 3190,3956.75 3126.75,3956.75 3120,3950 3120,3774.39 3134.39,3760 3194.29,3760 3214.29,3780 3249.2,3780 R7_CO6.1@3249.2,3716 3249.2,3541.22 ; R3_CO7.1@3248.6,4616.75 3248.6,4625.61 3234.9,4639.31 3207.44,4639.31 3190,4656.75 3126.75,4656.75 3120,4650 3120,4474.39 3134.39,4460 3194.29,4460 3214.29,4480 3249.2,4480 R7_CO7.1@3249.2,4416 3249.2,4241.22 ; R3_CO8.1@3248.77,5308.72 R1_CO8.1@3248.77,5408.72 ; R3_CO1.1@3249.2,406.75 R1_CO1.1@3249.2,506.75 ; R3_CO2.1@3249.2,1106.75 R1_CO2.1@3249.2,1206.75 ; R3_CO3.1@3249.2,1806.75 R1_CO3.1@3249.2,1906.75 ; R3_CO4.1@3249.2,2506.75 R1_CO4.1@3249.2,2606.75 ; R3_CO5.1@3249.2,3206.75 R1_CO5.1@3249.2,3306.75 ; R3_CO6.1@3249.2,3906.75 R1_CO6.1@3249.2,4006.75 ; 3249.2,4242.76 3252.16,4239.8 R1_CO6.1@3252.16,4010.96 ; R3_CO7.1@3249.2,4606.75 R1_CO7.1@3249.2,4706.75 ; 3252.16,739.8 R1_CO1.1@3252.16,510.96 R7_CO2.1@3252.16,913.05 ; 3252.16,1439.8 R1_CO2.1@3252.16,1210.96 R7_CO3.1@3252.16,1613.05 ; 3252.16,2139.8 R1_CO3.1@3252.16,1910.96 R7_CO4.1@3252.16,2313.05 ; 3252.16,2839.8 R1_CO4.1@3252.16,2610.96 R7_CO5.1@3252.16,3013.05 ; 3252.16,3539.8 R1_CO5.1@3252.16,3310.96 R7_CO6.1@3252.16,3713.05
TRANSMIT: IC3_CO1.3 IC3_CO1.7 IC3_CO1.11 IC3_CO1.15 IC3_CO2.3 IC3_CO2.7 IC3_CO2.11 IC3_CO2.15 IC3_CO3.3 IC3_CO3.7 IC3_CO3.11 IC3_CO3.15 IC3_CO4.3 IC3_CO4.7 IC3_CO4.11 IC3_CO4.15 IC3_CO5.3 IC3_CO5.7 IC3_CO5.11 IC3_CO5.15 IC3_CO6.3 IC3_CO6.7 IC3_CO6.11 IC3_CO6.15 IC3_CO7.3 IC3_CO7.7 IC3_CO7.11 IC3_CO7.15 IC3_CO8.3 IC3_CO8.7 IC3_CO8.11 IC3_CO8.15 P1.12 P3.12 P_T.1 | length 24184.1
  Top Layer w10: P_T.1@1180,4250 1050,4380 1050,5590 1135,5675 4460,5675 4595,5540 v1(4595,5365) 4647.5,5312.5 4681.63,5312.5 IC3_CO8.3@4687.16,5306.97 4774.57,5306.97 ; v1(4595.43,463.03) 4647.94,410.53 4682.06,410.53 IC3_CO1.3@4687.59,405 4775,405 ; v1(4595.43,1163.03) 4647.94,1110.53 4682.06,1110.53 IC3_CO2.3@4687.59,1105 4775,1105 ; v1(4595.43,1863.03) 4647.94,1810.53 4682.06,1810.53 IC3_CO3.3@4687.59,1805 4775,1805 ; v1(4595.43,2563.03) 4647.94,2510.53 4682.06,2510.53 IC3_CO4.3@4687.59,2505 4775,2505 ; v1(4595.43,3263.03) 4647.94,3210.53 4682.06,3210.53 IC3_CO5.3@4687.59,3205 4775,3205 ; v1(4595.43,3963.03) 4647.94,3910.53 4682.06,3910.53 IC3_CO6.3@4687.59,3905 4775,3905 ; v1(4595.43,4663.03) 4647.94,4610.53 4682.06,4610.53 IC3_CO7.3@4687.59,4605 4775,4605 ; IC3_CO8.7@4687.16,5106.97 4662.16,5131.97 4599.57,5131.97 4539.57,5071.97 4582.19,5029.35 4798.71,5029.35 4804.57,5035.21 4804.57,5121.99 4839.54,5156.97 ; IC3_CO1.7@4687.59,205 4662.59,230 4600,230 4540,170 4582.62,127.38 4799.14,127.38 4805,133.24 4805,220.02 4839.98,255 ; IC3_CO2.7@4687.59,905 4662.59,930 4600,930 4540,870 4582.62,827.38 4799.14,827.38 4805,833.24 4805,920.02 4839.98,955 ; IC3_CO3.7@4687.59,1605 4662.59,1630 4600,1630 4540,1570 4582.62,1527.38 4799.14,1527.38 4805,1533.24 4805,1620.02 4839.98,1655 ; IC3_CO4.7@4687.59,2305 4662.59,2330 4600,2330 4540,2270 4582.62,2227.38 4799.14,2227.38 4805,2233.24 4805,2320.02 4839.98,2355 ; IC3_CO5.7@4687.59,3005 4662.59,3030 4600,3030 4540,2970 4582.62,2927.38 4799.14,2927.38 4805,2933.24 4805,3020.02 4839.98,3055 ; IC3_CO6.7@4687.59,3705 4662.59,3730 4600,3730 4540,3670 4582.62,3627.38 4799.14,3627.38 4805,3633.24 4805,3720.02 4839.98,3755 ; IC3_CO7.7@4687.59,4405 4662.59,4430 4600,4430 4540,4370 4582.62,4327.38 4799.14,4327.38 4805,4333.24 4805,4420.02 4839.98,4455 ; IC3_CO8.11@4901.72,5156.97 4839.54,5156.97 ; IC3_CO8.15@4901.72,5356.97 4824.57,5356.97 4774.57,5306.97 ; IC3_CO1.11@4902.16,255 4839.98,255 ; IC3_CO1.15@4902.16,455 4825,455 4775,405 ; IC3_CO2.11@4902.16,955 4839.98,955 ; IC3_CO2.15@4902.16,1155 4825,1155 4775,1105 ; IC3_CO3.11@4902.16,1655 4839.98,1655 ; IC3_CO3.15@4902.16,1855 4825,1855 4775,1805 ; IC3_CO4.11@4902.16,2355 4839.98,2355 ; IC3_CO4.15@4902.16,2555 4825,2555 4775,2505 ; IC3_CO5.11@4902.16,3055 4839.98,3055 ; IC3_CO5.15@4902.16,3255 4825,3255 4775,3205 ; IC3_CO6.11@4902.16,3755 4839.98,3755 ; IC3_CO6.15@4902.16,3955 4825,3955 4775,3905 ; IC3_CO7.11@4902.16,4455 4839.98,4455 ; IC3_CO7.15@4902.16,4655 4825,4655 4775,4605 ; 4774.57,5306.97 4774.57,5221.95 4839.54,5156.97 ; 4775,405 4775,319.98 4839.98,255 ; 4775,1105 4775,1019.98 4839.98,955 ; 4775,1805 4775,1719.98 4839.98,1655 ; 4775,2505 4775,2419.98 4839.98,2355 ; 4775,3205 4775,3119.98 4839.98,3055 ; 4775,3905 4775,3819.98 4839.98,3755 ; 4775,4605 4775,4519.98 4839.98,4455
  Bottom Layer w10: v1(4595,5365) 4680,5280 4680,4860 4595.43,4775.43 v1(4595.43,4663.03) ; v1(4595.43,463.03) 4595.43,575.43 4685,665 4685,1073.46 v1(4595.43,1163.03) 4595.43,1290.43 4680,1375 4680,1778.46 v1@4598.46,1860 ; 4680.43,3878.03 v1(4595.43,3963.03) 4595.43,4080.43 4690,4175 4690,4568.46 v1(4595.43,4663.03) ; 4685,3873.46 4685,3510 4595.43,3420.43 v1(4595.43,3263.03) 4695,3163.46 4695,2825 4595.43,2725.43 v1(4595.43,2563.03) 4710,2448.46 4710,2080 4595.43,1965.43 v1(4595.43,1863.03) v1@4598.46,1860 ; P1.12@6045,1676.75 5846.75,1875 5075,1875 5040,1840 4730,1840 4710,1860 v1@4598.46,1860 ; P3.12@6925,4498.57 6729.34,4694.23 5054.23,4694.23 5015,4655 4603.97,4655 4595.94,4663.03 v1(4595.43,4663.03)
pads on no net: IC3_CO1.13 IC3_CO2.13 IC3_CO3.13 IC3_CO4.13 IC3_CO5.13 IC3_CO6.13 IC3_CO7.13 IC3_CO8.13 IC4_CO1.6 IC4_CO1.9 IC4_CO2.6 IC4_CO2.9 IC4_CO3.6 IC4_CO3.9 IC4_CO4.6 IC4_CO4.9 IC4_CO5.6 IC4_CO5.9 IC4_CO6.6 IC4_CO6.9 IC4_CO7.6 IC4_CO7.9 IC4_CO8.6 IC4_CO8.9 P1.13 P1.14 P2.2 P2.3 P2.12 P2.13 P2.14 P3.13 P3.14 P4.2 P4.3 P4.12 P4.13 P4.14

## Polygon pours and split planes (outlines as drawn)
-5 on Bottom Layer "Bottom Layer--5" (solid, pour order 4): 1340.43,4173.03 4055.43,4173.03 4055.43,101.49 1340.43,101.49
-5 on Bottom Layer "Bottom Layer--5" (solid, pour order 5): 1340,5575 4055,5575 4055,75 1340,75
GND on GND (split plane): 7349.9,20.1 1020.1,20.1 1020.1,5679.9 7349.9,5679.9
+5 on VCC (split plane): 7349.9,20.1 1020.1,20.1 1020.1,5679.9 7349.9,5679.9

## Silkscreen, mask and mechanical layers (free items; w line width, h text height)
Top Overlay:
  text "+5V" at 5770,4358.99 h60
  text "+5V" at 7070,1540 h60
Mechanical 1:
  lines w10: 7360,5700 7370,5690
Mechanical 13:
  the board outline again, w20

## Text inside footprints (layer, text, board x,y; h text height)
P1_CO1: Top Overlay "8" at 1545,133.03 h30 r270; Top Overlay "7" at 1445,133.03 h30 r270; Top Overlay "1" at 1445,594.67 h30 r270; Top Overlay "2" at 1545,614.67 h30 r270
P1_CO2: Top Overlay "8" at 1545,833.36 h30 r270; Top Overlay "7" at 1445,833.03 h30 r270; Top Overlay "1" at 1445,1293.03 h30 r270; Top Overlay "2" at 1545,1303.03 h30 r270
P1_CO3: Top Overlay "8" at 1545,1533.03 h30 r270; Top Overlay "7" at 1445,1533.03 h30 r270; Top Overlay "1" at 1445,1992.07 h30 r270; Top Overlay "2" at 1545,2012.07 h30 r270
P1_CO4: Top Overlay "8" at 1545,2233.03 h30 r270; Top Overlay "7" at 1445,2233.03 h30 r270; Top Overlay "1" at 1445,2692.07 h30 r270; Top Overlay "2" at 1545,2712.07 h30 r270
P1_CO5: Top Overlay "8" at 1545,2933.03 h30 r270; Top Overlay "7" at 1445,2933.03 h30 r270; Top Overlay "1" at 1445,3383.03 h30 r270; Top Overlay "2" at 1545,3403.03 h30 r270
P1_CO6: Top Overlay "8" at 1545,3633.03 h30 r270; Top Overlay "7" at 1445,3633.03 h30 r270; Top Overlay "1" at 1445,4083.03 h30 r270; Top Overlay "2" at 1545,4103.03 h30 r270
P1_CO7: Top Overlay "8" at 1545,4333.03 h30 r270; Top Overlay "7" at 1445,4333.03 h30 r270; Top Overlay "1" at 1445,4783.03 h30 r270; Top Overlay "2" at 1545,4803.03 h30 r270
P1_CO8: Top Overlay "8" at 1545,5035 h30 r270; Top Overlay "7" at 1445,5035 h30 r270; Top Overlay "1" at 1444.57,5481.97 h30 r270; Top Overlay "2" at 1544.57,5501.97 h30 r270